# EAGLE board VCA_revA (EAGLE 9.5.1)
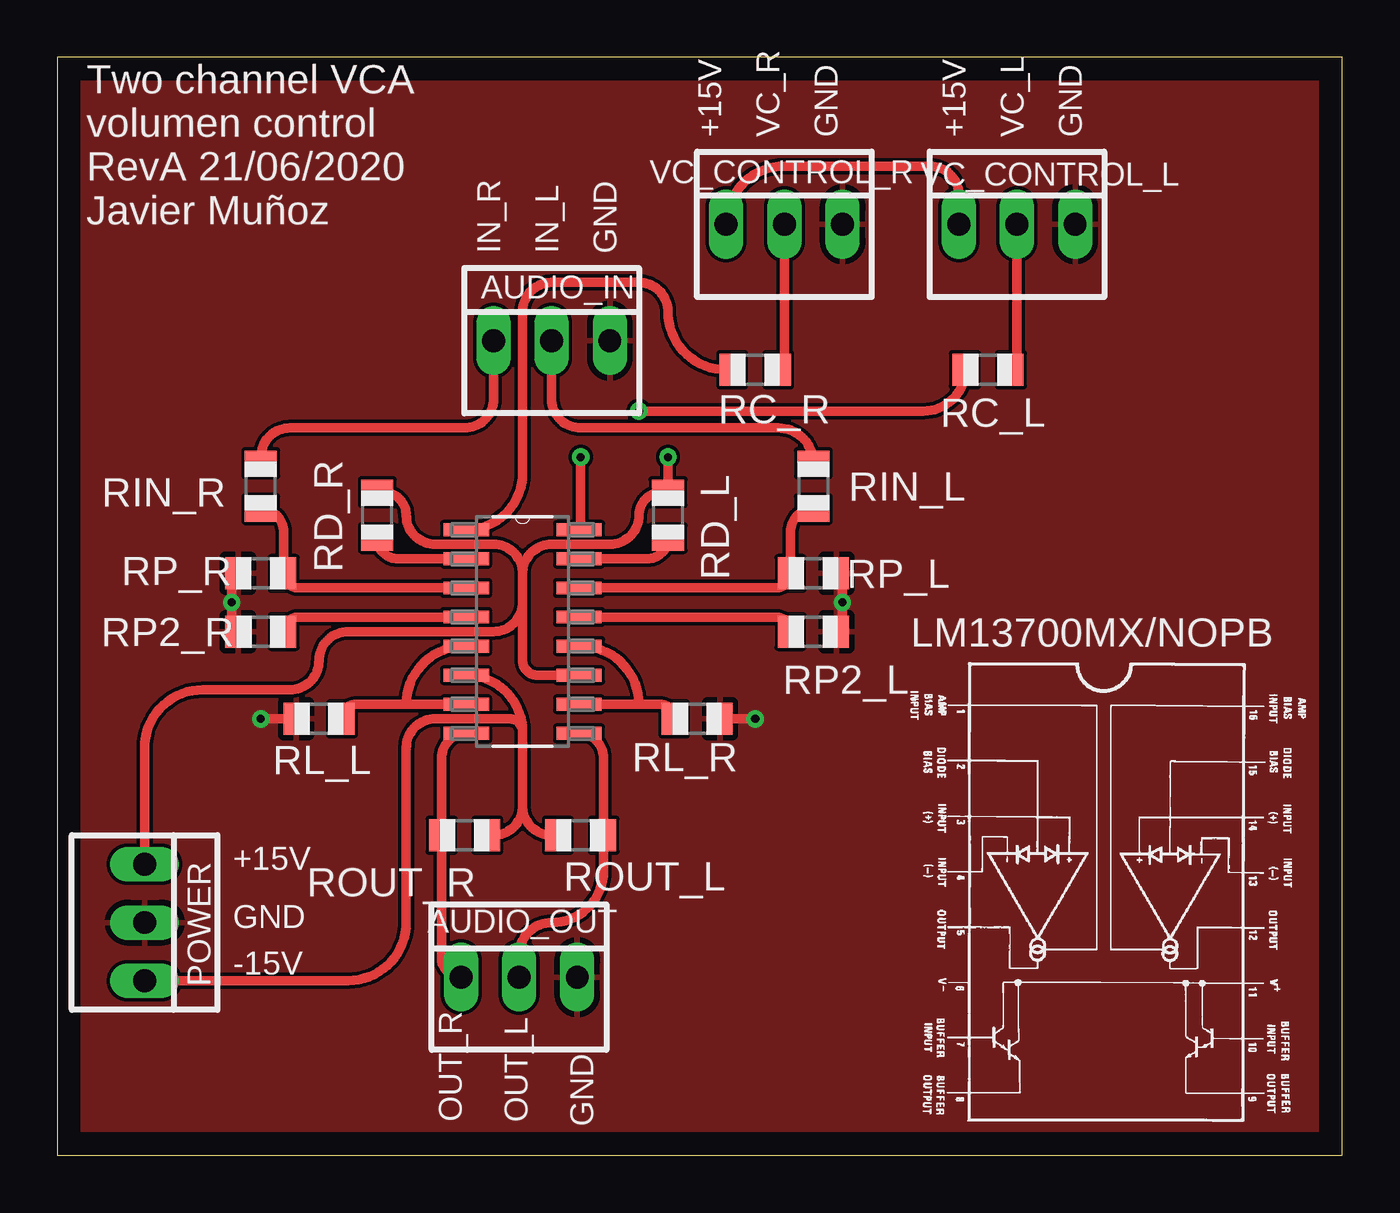
[diagram p0: board, top side]
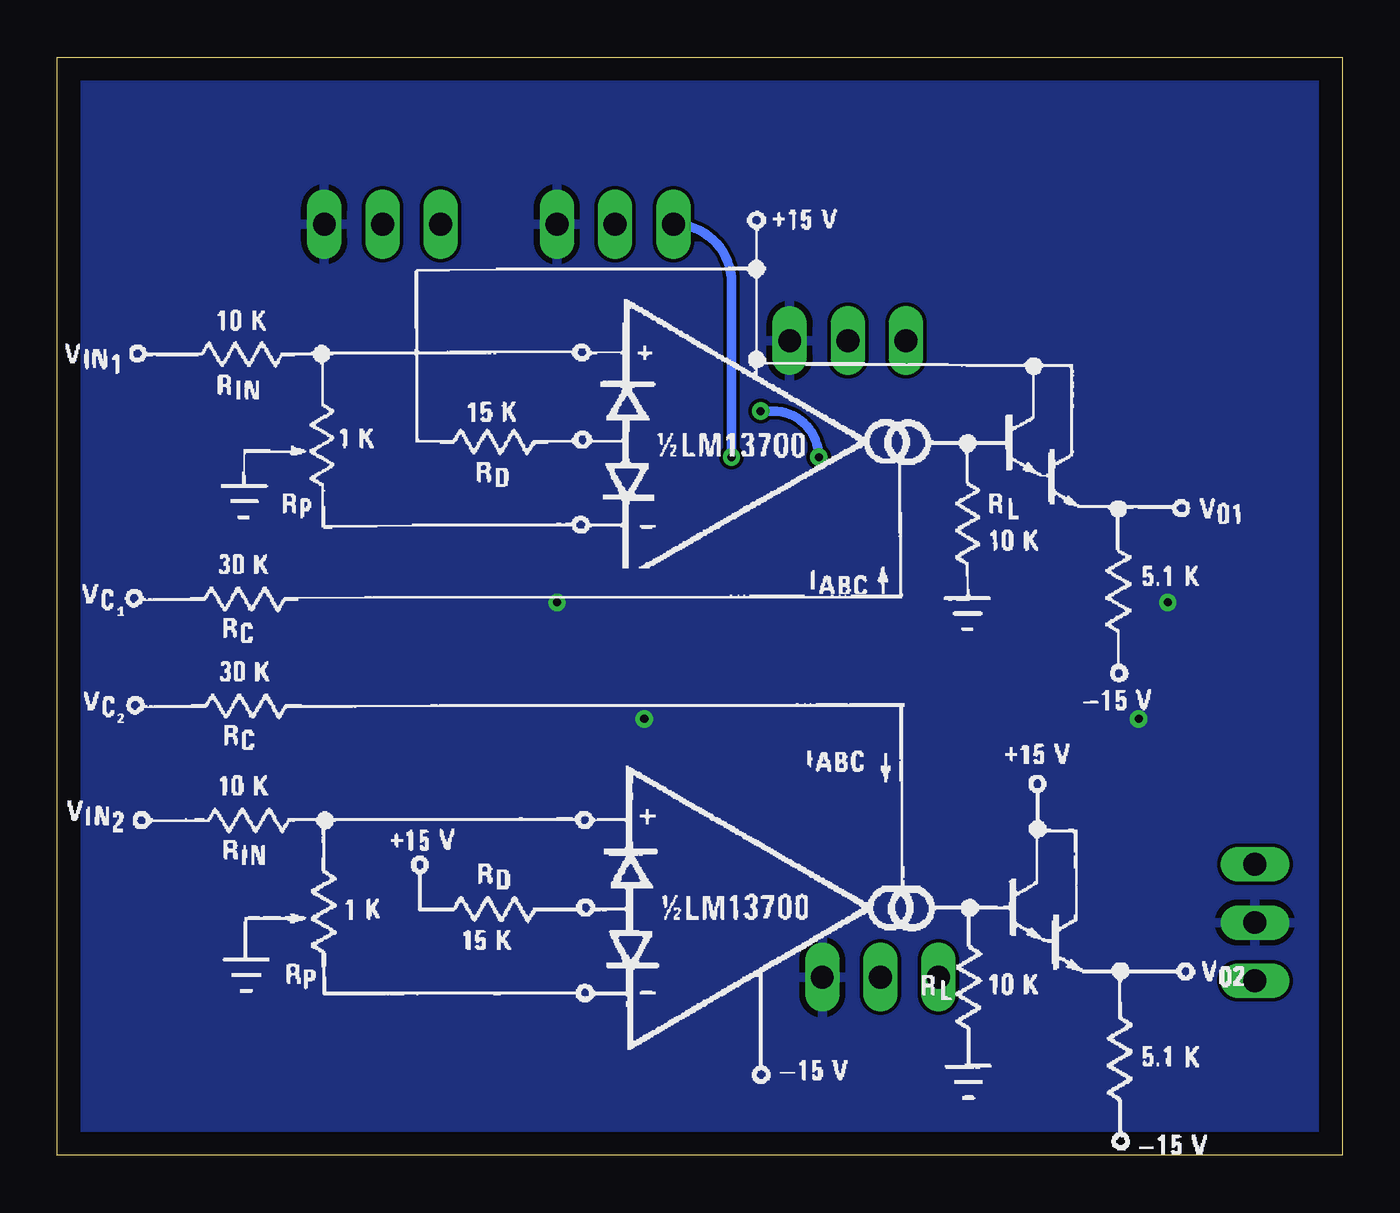
[diagram p1: board, bottom side, seen from below]

Size 56.11 x 47.93 mm. Coordinates in mm from the lower left corner, seen from the top.
Outline: 0,0 56.11,0 56.11,47.93 0,47.93 0,0
Copper layers (1*16): Top 0.035mm / dielectric 1.5mm / Bottom 0.035mm
Design rules "default": minimum track width 6mil, minimum drill 0.35mm, track to track 6mil, track to pad 6mil, pad to pad 6mil, via to via 6mil, smd to smd 6mil, copper to edge 40mil, drill to drill 6mil, minimum pad ring 10mil, minimum via ring 8mil, stop-mask expansion 4mil, vias tented up to drill 0mil, thermal gap 10mil

## Footprints (pad centres in the part's own frame; a part is rotated, then mirrored left to right if it is on the bottom)
22-23-2031 = drill 1 long: 1 -2.54,0; 2 0,0; 3 2.54,0
SOIC127P620X175-16N = smd 1.981 x 0.559: 1 -2.464,4.445; 2 -2.464,3.175; 3 -2.464,1.905; 4 -2.464,0.635; 5 -2.464,-0.635; 6 -2.464,-1.905; 7 -2.464,-3.175; 8 -2.464,-4.445; 9 2.464,-4.445; 10 2.464,-3.175; 11 2.464,-1.905; 12 2.464,-0.635; 13 2.464,0.635; 14 2.464,1.905; 15 2.464,3.175; 16 2.464,4.445
R0805 = smd 1.1 x 1.4: 1 -1,0; 2 1,0

## Placement (x,y rotation side)
AUDIO_IN  22-23-2031  [22-23-2031]  21.59,35.56 0 top
AUDIO_OUT  22-23-2031  [22-23-2031]  20.17,7.77 0 top
LM13700MX/NOPB  LM13700MX/NOPB  [SOIC127P620X175-16N]  20.32,22.86 0 top
POWER  22-23-2031  [22-23-2031]  3.81,10.16 270 top
RC_L  30K  [R0805]  40.64,34.29 0 top
RC_R  30K  [R0805]  30.48,34.29 0 top
RD_L  15K  [R0805]  26.67,27.94 270 top
RD_R  15K  [R0805]  13.97,27.94 270 top
RIN_L  10K  [R0805]  33.02,29.21 270 top
RIN_R  10K  [R0805]  8.89,29.21 270 top
RL_L  10k  [R0805]  11.43,19.05 0 top
RL_R  10k  [R0805]  27.94,19.05 180 top
ROUT_L  5,1k  [R0805]  22.86,13.97 0 top
ROUT_R  5,1k  [R0805]  17.78,13.97 180 top
RP2_L  510  [R0805]  33.02,22.86 0 top
RP2_R  510  [R0805]  8.89,22.86 180 top
RP_L  510  [R0805]  33.02,25.4 180 top
RP_R  510  [R0805]  8.89,25.4 0 top
VC_CONTROL_L  22-23-2031  [22-23-2031]  41.91,40.64 0 top
VC_CONTROL_R  22-23-2031  [22-23-2031]  31.75,40.64 0 top

## Library data of the parts
AUDIO_IN AUDIO_OUT POWER VC_CONTROL_L VC_CONTROL_R = con-molex; MF: MOLEX; MPN: 22-23-2031; OC_FARNELL: 1462950; OC_NEWARK: 30C0862
LM13700MX/NOPB = LM13700MX_NOPB; AVAILABILITY: Unavailable; DESCRIPTION: Transconductance Amplifier 2 Circuit Push-Pull 16-SOIC; MF: Texas Instruments; MP: LM13700MX/NOPB; PACKAGE: SOIC-16 Nichicon; PRICE: None
RC_L RC_R RD_L RD_R RIN_L RIN_R RL_L RL_R ROUT_L ROUT_R RP2_L RP2_R RP_L RP_R = adafruit

## Nets
-15V: LM13700MX/NOPB.6 POWER.3 ROUT_L.1 ROUT_R.1
AMP_BIAS_IN: LM13700MX/NOPB.16 RC_L.1
AMP_BIAS_IN_2: LM13700MX/NOPB.1 RC_R.1
AUDIO_L: AUDIO_IN.2 RIN_L.1
AUDIO_L+: LM13700MX/NOPB.14 RIN_L.2 RP_L.2
AUDIO_L-: LM13700MX/NOPB.13 RP2_L.1
AUDIO_R: AUDIO_IN.1 RIN_R.1
AUDIO_R+: LM13700MX/NOPB.3 RIN_R.2 RP_R.2
AUDIO_R-: LM13700MX/NOPB.4 RP2_R.1
DIODE_BIAS: LM13700MX/NOPB.15 RD_L.2
DIODE_BIAS_2: LM13700MX/NOPB.2 RD_R.2
GND: AUDIO_IN.3 AUDIO_OUT.3 POWER.2 RL_L.1 RL_R.1 RP2_L.2 RP2_R.2 RP_L.1 RP_R.1 VC_CONTROL_L.3 VC_CONTROL_R.3
OPAMP_OUT_1: LM13700MX/NOPB.5 LM13700MX/NOPB.7 RL_L.2
OPAMP_OUT_2: LM13700MX/NOPB.10 LM13700MX/NOPB.12 RL_R.2
OUT_L: AUDIO_OUT.2 LM13700MX/NOPB.9 ROUT_L.2
OUT_R: AUDIO_OUT.1 LM13700MX/NOPB.8 ROUT_R.2
VC_CONTROL_L: RC_L.2 VC_CONTROL_L.2
VC_CONTROL_R: RC_R.2 VC_CONTROL_R.2
VCC: LM13700MX/NOPB.11 POWER.1 RD_L.1 RD_R.1 VC_CONTROL_L.1 VC_CONTROL_R.1

## Tracks (layer width: path | path; a pad name or v marks a point on that pad's centre or on a via)
-15V
  Top 0.406: LM13700MX/NOPB.6 arc-90 20.32,18.49 | 20.32,18.49 20.32,15.24 | 20.32,15.24 arc90 21.59,13.97 ROUT_L.1 | 20.32,15.24 arc-90 19.05,13.97 ROUT_R.1 | POWER.3 12.7,7.62 arc90 15.24,10.16 15.24,17.78 arc-90 16.51,19.05 19.76,19.05 arc-90 20.32,18.49
AMP_BIAS_IN  (via drill 0.35)
  Top 0.406: RC_L.1 arc-90 37.83,32.48 v25.4,32.48 | v22.86,30.48 22.86,27.38 arc-90 LM13700MX/NOPB.16
  Bottom 0.406: v25.4,32.48 24.86,32.48 arc90 v22.86,30.48
AMP_BIAS_IN_2
  Top 0.406: LM13700MX/NOPB.1 arc90 20.32,29.77 20.32,36.83 arc-90 21.59,38.1 25.4,38.1 arc-90 26.67,36.83 arc90 29.21,34.29 RC_R.1
AUDIO_L
  Top 0.406: RIN_L.1 arc90 31.48,31.75 22.86,31.75 arc-90 21.59,33.02 AUDIO_IN.2
AUDIO_L+
  Top 0.406: 33.29,27.94 arc90 RIN_L.2 arc90 32.02,27.21 RP_L.2 arc-90 31.38,24.76 LM13700MX/NOPB.14
AUDIO_L-
  Top 0.406: LM13700MX/NOPB.13 31.38,23.5 arc-90 RP2_L.1
AUDIO_R
  Top 0.406: RIN_R.1 8.89,30.48 arc-90 10.16,31.75 17.78,31.75 arc90 19.05,33.02 AUDIO_IN.1
AUDIO_R+
  Top 0.406: LM13700MX/NOPB.3 10.52,24.76 arc-90 RP_R.2 9.89,27.21 arc90 RIN_R.2
AUDIO_R-
  Top 0.406: LM13700MX/NOPB.4 10.52,23.5 arc90 RP2_R.1
DIODE_BIAS
  Top 0.406: LM13700MX/NOPB.15 25.76,26.04 arc90 RD_L.2
DIODE_BIAS_2
  Top 0.406: LM13700MX/NOPB.2 14.87,26.04 arc-90 RD_R.2
GND  (via drill 0.35)
  Top 0.406: 34.29,25.4 RP_L.1 arc-90 34.29,25.13 v34.29,24.13 34.29,23.13 arc-90 RP2_L.2 | 7.62,22.86 RP2_R.2 arc-90 7.62,23.13 v7.62,24.13 7.62,25.13 arc-90 RP_R.1 7.62,25.4 | RL_R.1 v30.48,19.05 | RL_L.1 v8.89,19.05
  pour Bottom: 0,48.26 56.13,48.26 56.13,0 0,0
  pour Top: 0.05,-0.25 0.05,48.01 56.44,48.01 56.44,-0.25
OPAMP_OUT_1
  Top 0.406: LM13700MX/NOPB.7 15.24,19.68 | 15.24,19.68 13.06,19.68 arc90 RL_L.2 | LM13700MX/NOPB.5 17.78,22.22 arc90 15.24,19.68
OPAMP_OUT_2
  Top 0.406: LM13700MX/NOPB.10 25.4,19.68 | 25.4,19.68 26.3,19.68 arc-90 RL_R.2 | LM13700MX/NOPB.12 22.86,22.22 arc-90 25.4,19.68
OUT_L
  Top 0.406: LM13700MX/NOPB.9 arc-90 23.86,17.34 ROUT_L.2 23.86,12.43 arc-90 21.59,10.16 arc90 20.17,8.74 AUDIO_OUT.2
OUT_R
  Top 0.406: LM13700MX/NOPB.8 arc90 16.78,17.34 ROUT_R.2 16.78,8.62 arc90 AUDIO_OUT.1
VC_CONTROL_L
  Top 0.406: VC_CONTROL_L.2 41.91,34.56 arc-90 RC_L.2
VC_CONTROL_R
  Top 0.406: VC_CONTROL_R.2 31.75,34.56 arc-90 RC_R.2
VCC  (via drill 0.35)
  Top 0.406: POWER.1 3.81,17.78 arc-90 6.35,20.32 10.16,20.32 arc90 11.43,21.59 arc-90 12.7,22.86 19.05,22.86 arc90 20.32,24.13 | 20.32,24.13 20.32,25.4 | 20.32,25.4 arc90 19.05,26.67 16.51,26.67 arc-90 15.24,27.94 arc90 14.24,28.94 RD_R.1 | 20.32,25.4 arc-90 21.59,26.67 24.13,26.67 arc90 25.4,27.94 arc-90 26.4,28.94 RD_L.1 v26.67,30.48 | VC_CONTROL_R.1 arc-90 31.75,43.18 38.1,43.18 arc-90 39.37,41.91 VC_CONTROL_L.1 | LM13700MX/NOPB.11 20.95,20.96 arc-90 20.32,21.59 20.32,24.13
  Bottom 0.406: v26.67,30.48 26.67,38.1 arc-90 VC_CONTROL_R.1

## Text on the board
tNames: +15V | VC_R | GND | +15V | VC_L | GND | Two channel VCA / volumen control / RevA 21/06/2020 / Javier Muñoz | IN_R | IN_L | GND | +15V | GND | -15V | OUT_R | OUT_L | GND